# Altium PCB Copy of Copy of smarthome.PcbDoc
Units mm, origin at the board's own origin, x right, y up, seen from the top; angles counter-clockwise.
Board outline 60 x 100 mm, 2 copper layers (Top Layer, Bottom Layer); 21 components, 42 nets, 109 pads, 0 vias.
Unrouted connection lines stored in the file: 15.
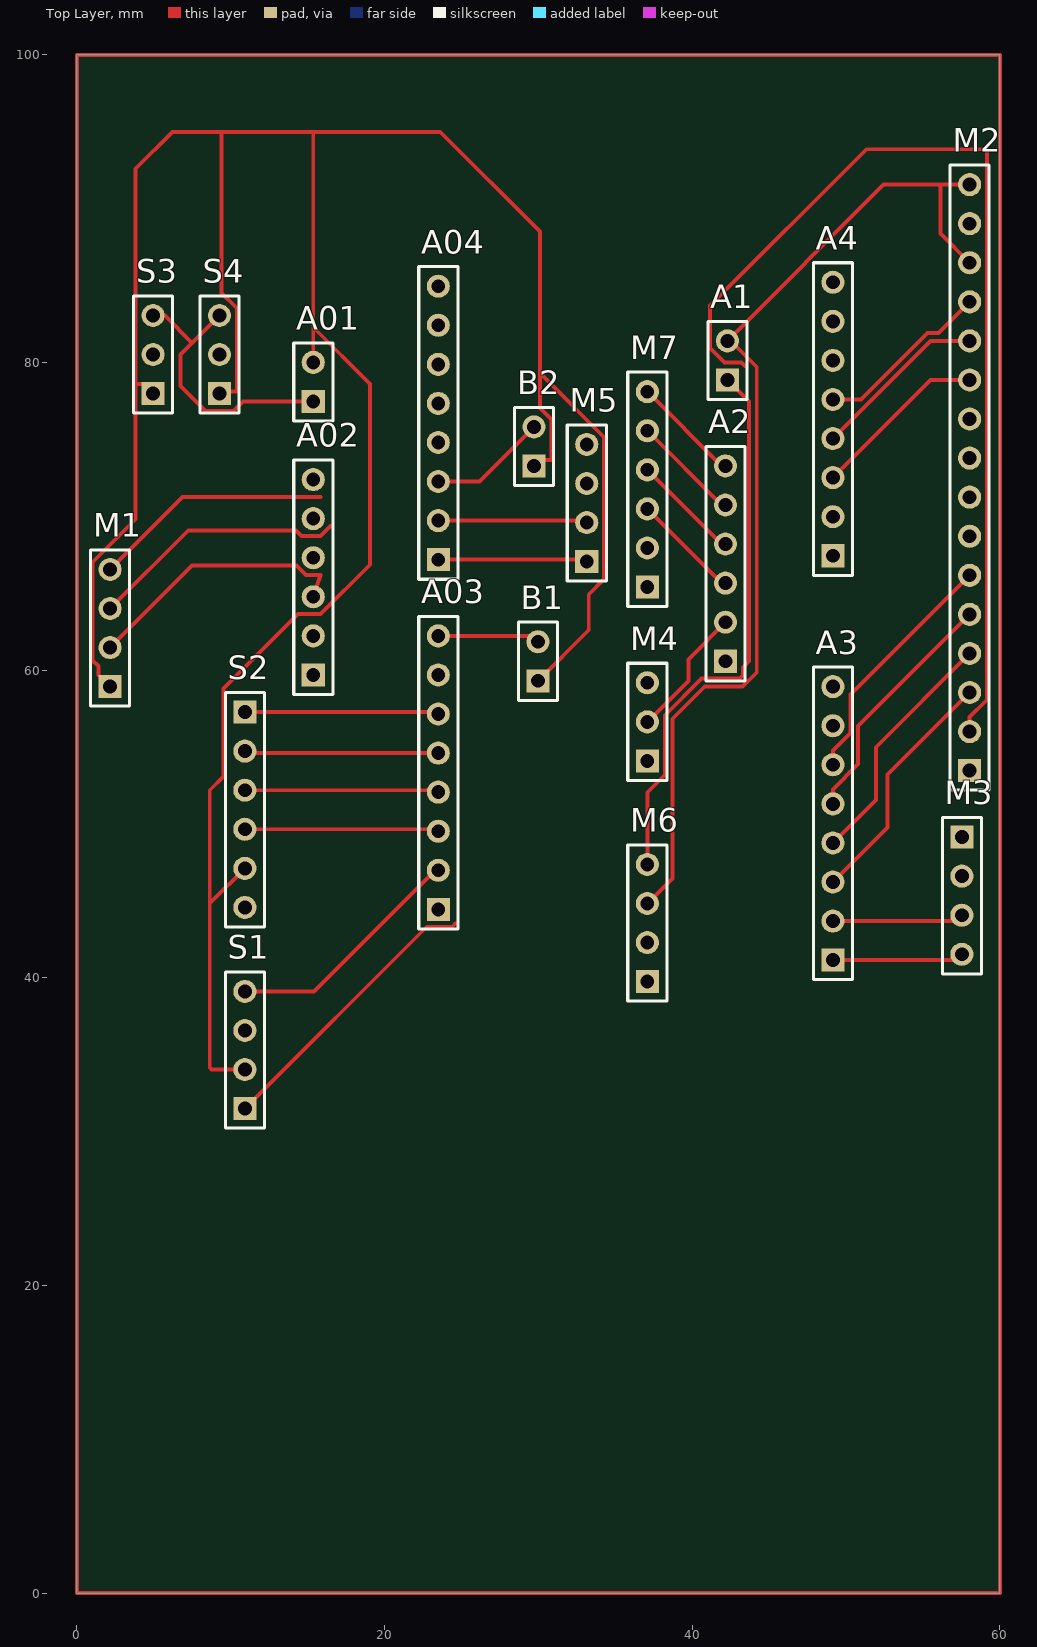
[diagram p0: Top Layer view]
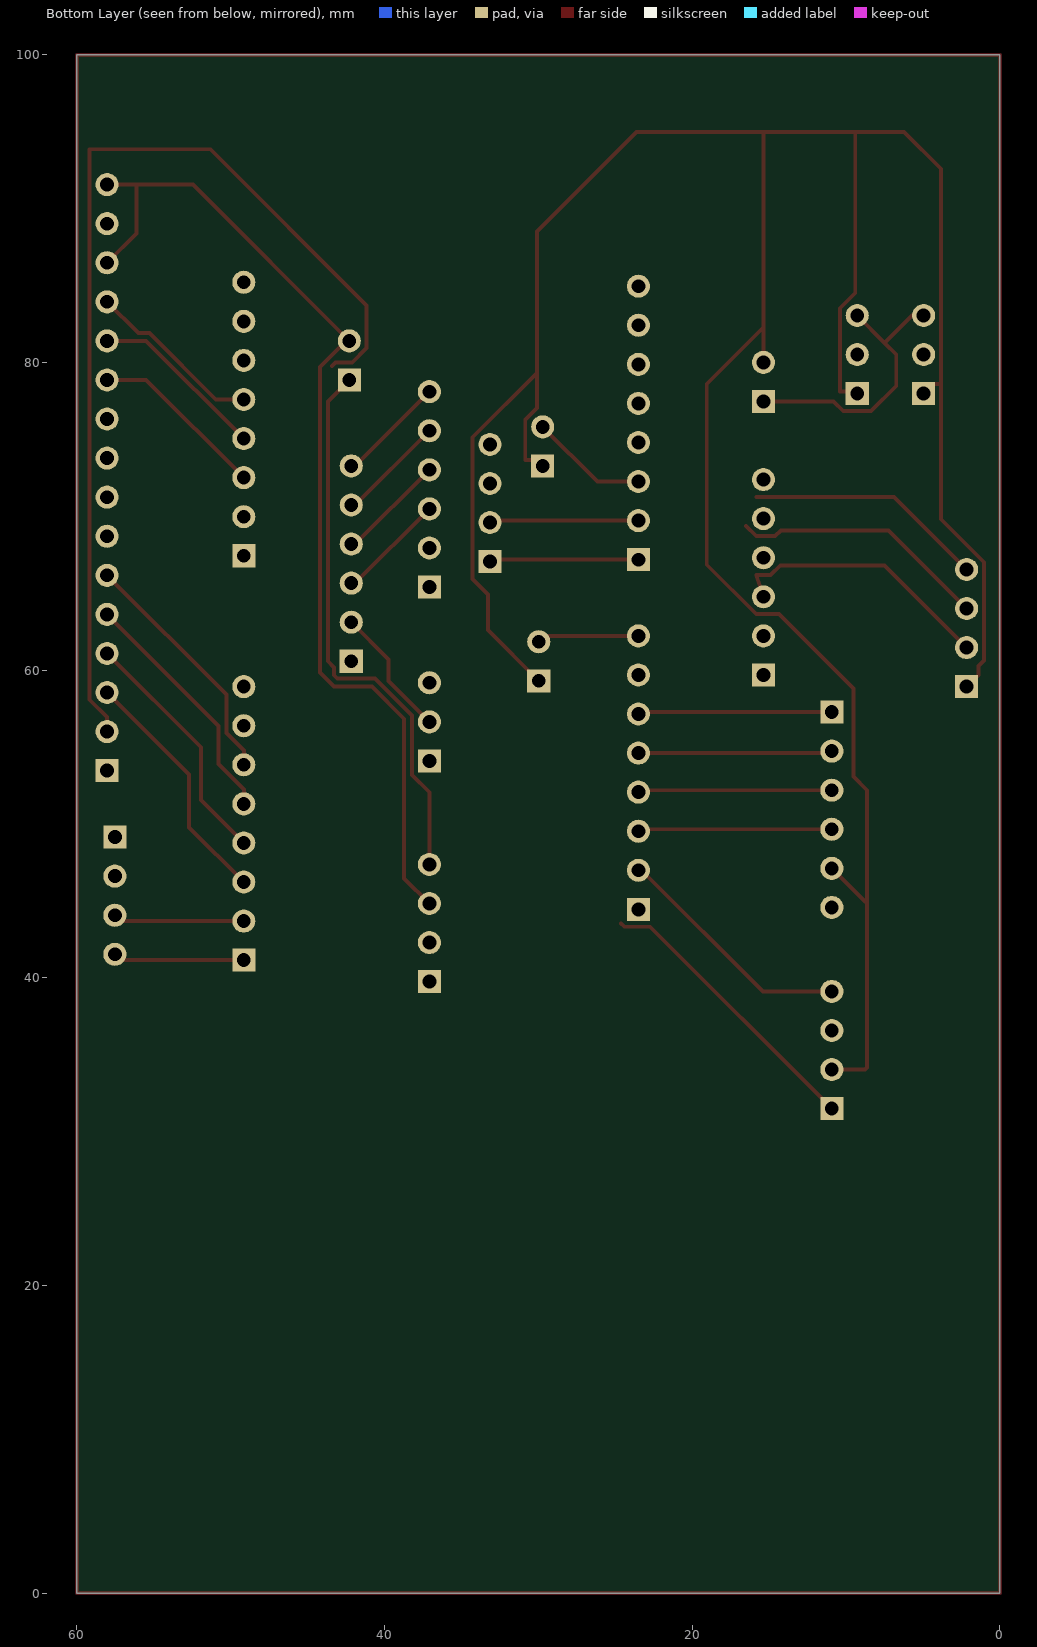
[diagram p1: Bottom Layer view, seen from below]

## Layer stack, top to bottom
Top Solder: solder mask 0.0102, Solder Resist, Dk 3.5
Top Layer: signal copper 0.0356
Dielectric 1: dielectric 0.32, FR-4, Dk 4.8
Bottom Layer: signal copper 0.0356
Bottom Solder: solder mask 0.0102, Solder Resist, Dk 3.5

## Board outline
0,0 60,0 60,100 0,100

## Design rules (kind name [scope] priority, off if disabled: settings)
Clearance [All] p1: gap=0.254 ignorepadtopadclearanceinfootprint=FALSE except(0: Arc-Hole Track-Hole SMDPad-Hole THPad-Hole Via-Hole Fill-Hole Poly-Hole Region-Hole Text-Hole)
PolygonConnect [All] p1: connectstyle=Relief reliefconductorwidth=0.254 reliefentries=4 polygonreliefangle="90 Angle" airgapwidth=0.254
RoomDefinition smarthome_ALL [InComponentClass('smarthome_ALL')] p1: confinementstyle=ConfineIn formatcopy=TRUE lockcomponents=FALSE outline -181.483,0 -130.683,0 -130.683,25.4 -181.483,25.4
RoutingVias [All] p1: holewidth=0.711 width=1.27 viastyle="Through Hole" minholewidth=0.711 minwidth=1.27 maxholewidth=0.711 maxwidth=1.27
SolderMaskExpansion [All] p1: expansion=0.102
Width [All] p1: maxlimit=0.254 minlimit=0.254 preferedwidth=0.254
30 further rules are at their usual default settings.

## Components (designator, comment, footprint, x,y, rotation, side; value= is the part's Value field where it differs from the comment)
A1 "ARD2(Power)" HDR1X2 42.291,78.867 r90 top
A01 "ARD1(Power)" HDR1X2 15.367,77.47 r90 top
A2 "ARD2(Analog)" HDR1X6 42.164,60.579 r90 top
A02 "ARD1(Analog)" HDR1X6 15.367,59.69 r90 top
A3 "ARD2(Digital)" HDR1X8 49.149,41.148 r90 top
A03 "ARD1(Digital)" HDR1X8 23.495,44.45 r90 top
A4 "ARD2(Digital2)" HDR1X8 49.149,67.437 r90 top
A04 "ARD1(Digital2)" HDR1X8 23.495,67.183 r90 top
B1 "Buzzer" HDR1X2 29.972,59.309 r90 top
B2 "Buzzer" HDR1X2 29.718,73.279 r90 top
M1 "RGB" HDR1X4 2.159,58.928 r90 top
M2 "1602 LCD" HDR1X16 58.039,53.467 r90 top
M3 "RGB" HDR1X4 57.531,49.149 r270 top
M4 "LM35" HDR1X3 37.084,54.102 r90 top
M5 "ELB080005 LED" HDR1X4 33.147,67.056 r90 top
M6 "SZH-SSBH-011" HDR1X4 37.084,39.751 r90 top
M7 "Steppervmotor" HDR1X6 37.084,65.405 r90 top
S1 "SZH-EK105" HDR1X4 10.922,31.496 r90 top
S2 "SZH_SSBH_006" HDR1X6 10.922,57.277 r270 top
S3 "SZH_052" HDR1X3 4.953,77.978 r90 top
S4 "SZH_052" HDR1X3 9.271,77.978 r90 top

## Footprints (in the part's own frame and the unit in brackets; to place one, negate y for a bottom-side part, rotate by r counter-clockwise, add the part's x,y. Pads: shape width x height; smd on the part's side, far side on the other; paste and mask are expansions set on the pad)
HDR1X2 [mm] "Connector; Header; 2 Position"
  rect 1.5x1.5 hole 0.9: 1(0,0)
  round 1.5 hole 0.9: 2(2.54,0)
  silkscreen extent -1.27,-1.27 3.81,1.27
HDR1X3 [mm] "Connector; Header; 3 Position"
  rect 1.5x1.5 hole 0.9: 1(0,0)
  round 1.5 hole 0.9: 2(2.54,0) 3(5.08,0)
  silkscreen extent -1.27,-1.27 6.35,1.27
HDR1X4 [mm] "Connector; Header; 4 Position"
  rect 1.5x1.5 hole 0.9: 1(0,0)
  round 1.5 hole 0.9: 2(2.54,0) 3(5.08,0) 4(7.62,0)
  silkscreen extent -1.27,-1.27 8.89,1.27
HDR1X6 [mm] "Connector; Header; 6 Position"
  rect 1.5x1.5 hole 0.9: 1(0,0)
  round 1.5 hole 0.9: 2(2.54,0) 3(5.08,0) 4(7.62,0) 5(10.16,0) 6(12.7,0)
  silkscreen extent -1.27,-1.27 13.97,1.27
HDR1X8 [mm] "Connector; Header; 8 Position"
  rect 1.5x1.5 hole 0.9: 1(0,0)
  round 1.5 hole 0.9: 2(2.54,0) 3(5.08,0) 4(7.62,0) 5(10.16,0) 6(12.7,0) 7(15.24,0) 8(17.78,0)
  silkscreen extent -1.27,-1.27 19.05,1.27
HDR1X16 [mm] "Connector; Header; 16 Position"
  rect 1.5x1.5 hole 0.9: 1(0,0)
  round 1.5 hole 0.9: 2(2.54,0) 3(5.08,0) 4(7.62,0) 5(10.16,0) 6(12.7,0) 7(15.24,0) 8(17.78,0) 9(20.32,0) 10(22.86,0) 11(25.4,0) 12(27.94,0) 13(30.48,0) 14(33.02,0) 15(35.56,0) 16(38.1,0)
  silkscreen extent -1.27,-1.27 39.37,1.27

## Part data
A1 A01 B1 B2: library part "Header 2", "Header, 2-Pin", LatestRevisionDate=17-Jul-2002, LatestRevisionNote="Re-released for DXP Platform.", Publisher="Altium Limited"
A2 A02 M7 S2: library part "Header 6", "Header, 6-Pin", LatestRevisionDate=17-Jul-2002, LatestRevisionNote="Re-released for DXP Platform.", Publisher="Altium Limited"
A3 A03 A4 A04: library part "Header 8", "Header, 8-Pin", LatestRevisionDate=17-Jul-2002, LatestRevisionNote="Re-released for DXP Platform.", Publisher="Altium Limited"
M1 M3 M5 M6 S1: library part "Header 4", "Header, 4-Pin", LatestRevisionDate=17-Jul-2002, LatestRevisionNote="Re-released for DXP Platform.", Publisher="Altium Limited"
M2: library part "Header 16", "Header, 16-Pin", LatestRevisionDate=17-Jul-2002, LatestRevisionNote="Re-released for DXP Platform.", Publisher="Altium Limited"
M4 S3 S4: library part "Header 3", "Header, 3-Pin", LatestRevisionDate=17-Jul-2002, LatestRevisionNote="Re-released for DXP Platform.", Publisher="Altium Limited"

## Nets (pads, with @x,y where several pads share a name; then routed paths per layer and width w, separated by ;. In a path a pad name is that pad's centre, name@x,y a point inside that pad or via, vN(x,y) a via of type N, cw(c..) or ccw(c..) an arc to the next point about the centre after c; other vN are vias at no path point)
+5: A1.1 A01.1 M2.15 M4.3 M5.4 M6.4 S2.6 S3.3 S4.3 | length 54.7
  Top Layer w0.254: S3.3 5.715,83.058 7.493,81.28 ; S4.3 7.493,81.28 ; A01.1 10.802,77.47 10.179,76.847 8.363,76.847 6.731,78.479 6.731,80.518 7.493,81.28 ; M6.4 37.084,52.063 38.215,53.194 38.215,57.055 40.608,59.448 43.072,59.448 43.295,59.671 43.295,60.186 43.688,60.579 43.688,77.47 A1.1
+5V: M2.2 M7.2 S1.3 | length 66.1
  Top Layer w0.254: 43.422,79.775 43.199,79.998 42.101,79.998 41.16,80.939 41.16,83.705 51.32,93.865 59.17,93.865 59.17,58.079 58.039,56.948 M2.2
A00: A02.1 M1.4 | length 15.6
  Top Layer w0.254: M1.4 6.87,71.259 15.835,71.259
A0: A2.2 M4.2 | length 8.6
  Top Layer w0.254: M4.2 39.751,59.309 39.751,60.706 A2.2
A1: M6.1
A01: A02.2 M1.3 | length 16.9
  Top Layer w0.254: M1.3 7.239,69.088 14.236,69.088 14.605,68.719 15.835,68.719 16.498,69.382
A2: A2.3 M7.3 | length 7.1
  Top Layer w0.254: M7.3 41.91,65.659 A2.3
A02: A02.3 M1.2 | length 17.6
  Top Layer w0.254: M1.2 7.493,66.802 14.276,66.802 14.899,66.179 15.835,66.179 A02.3
A03: A02.4
A3: A2.4 M7.4 | length 7.1
  Top Layer w0.254: M7.4 41.91,68.199 A2.4
A04: A02.5
A4: A2.5 M7.5 | length 7.1
  Top Layer w0.254: M7.5 41.91,70.739 A2.5
A05: A02.6
A5: A2.6 M7.6 | length 7.1
  Top Layer w0.254: M7.6 41.91,73.279 A2.6
D00: A03.1
D0: A3.1 M3.4 | length 8.5
  Top Layer w0.254: A3.1 57.15,41.148 M3.4
D1: A3.2 M3.3 | length 8.5
  Top Layer w0.254: A3.2 57.15,43.688 M3.3
D01: A03.2 S1.4 | length 15.8
  Top Layer w0.254: S1.4 15.404,39.116 23.278,46.99 A03.2
D2: A3.3 M2.3 | length 16
  Top Layer w0.254: A3.3 52.705,49.784 52.705,53.213 M2.3
D02: A03.3 S2.4 | length 12.6
  Top Layer w0.254: S2.4 23.368,49.657 A03.3
D3: A3.4 M2.4 | length 16
  Top Layer w0.254: A3.4 51.943,51.562 51.943,54.991 M2.4
D03: A03.4 S2.3 | length 12.6
  Top Layer w0.254: S2.3 23.368,52.197 A03.4
D4: A3.5 M2.5 | length 16
  Top Layer w0.254: A3.5 49.149,52.249 50.788,53.888 50.788,56.376 M2.5
D04: A03.5 S2.2 | length 12.6
  Top Layer w0.254: S2.2 11.049,54.61 A03.5
D5: A3.6 M2.6 | length 16
  Top Layer w0.254: A3.6 49.149,54.789 50.28,55.92 50.28,58.408 M2.6
D05: A03.6 S2.1 | length 12.8
  Top Layer w0.254: S2.1 23.368,57.277 A03.6 A03.6@23.368,57.15
D6: A3.7
D06: A03.7
D7: A3.8
D07: A03.8 B1.2 | length 6.6
  Top Layer w0.254: A03.8 29.591,62.23 B1.2
D8: A4.1
D08: A04.1 M5.1 | length 9.9
  Top Layer w0.254: A04.1@23.622,67.056 A04.1 33.02,67.183 M5.1
D9: A4.2
D09: A04.2 M5.2 | length 9.9
  Top Layer w0.254: A04.2@23.622,69.596 A04.2 33.02,69.723 M5.2
D10: A4.3 M2.11 | length 11.5
  Top Layer w0.254: A4.3 55.499,78.867 M2.11
D010: A04.3 B2.2 | length 7.7
  Top Layer w0.254: A04.3 26.162,72.263 B2.2
D11: A4.4 M2.12 | length 11.5
  Top Layer w0.254: A4.4 55.499,81.407 M2.12
D011: A04.4
D012: A04.5
D12: A4.5 M2.13 | length 11.5
  Top Layer w0.254: A4.5 50.971,77.597 55.289,81.915 56.007,81.915 M2.13
D13: M3.2
GND: A01.2 A1.2 B1.1 B2.1 M1.1 M2.1 M2.14 M2.16 M3.1 M4.1 M5.3 M6.3 M7.1 S1.2 S2.5 S3.1 S4.1 | length 268.2
  Top Layer w0.254: M1.1 1.397,59.69 1.397,60.262 1.028,60.631 1.028,67.016 3.822,69.81 3.822,78.613 ; S3.1 4.318,78.613 3.822,78.613 ; S4.1 9.398,78.105 10.402,78.105 10.402,83.526 9.398,84.53 9.398,94.996 ; S1.2 8.763,34.036 8.636,34.163 8.636,44.958 ; S2.5 8.763,44.958 8.636,44.958 ; A01.2 15.367,82.296 ; B2.1 30.099,73.66 30.849,73.66 30.849,76.287 30.099,77.037 30.099,79.323 ; B1.1 33.274,62.611 33.274,64.921 34.278,65.925 34.278,75.144 30.099,79.323 ; M6.3 38.723,46.47 38.723,56.844 40.819,58.94 43.282,58.94 44.196,59.854 44.196,79.719 42.508,81.407 A1.2 52.451,91.567 56.134,91.567 ; M2.14 56.134,88.392 56.134,91.567 ; M2.16 56.134,91.567 ; 3.822,78.613 3.822,92.595 6.223,94.996 9.398,94.996 ; 8.636,44.958 8.636,52.197 9.525,53.086 9.525,58.801 14.363,63.639 15.835,63.639 19.05,66.854 19.05,78.613 15.367,82.296 ; 9.398,94.996 15.367,94.996 ; 15.367,82.296 15.367,94.996 ; 15.367,94.996 23.622,94.996 30.099,88.519 30.099,79.323
pads on no net: A2.1 A04.6 A4.6 A04.7 A4.7 A04.8 A4.8 M2.7 M2.8 M2.9 M2.10 M6.2 S1.1 S3.2 S4.2
copper on no net: | length 338.7
  Top Layer w0.254: 10.922,31.496 22.745,43.319 24.403,43.319 24.626,43.542 ; 0,0 60,0 60,100 0,100 0,0